# EAGLE board Lixieuhr_Master (EAGLE 7.7.0)

No outline drawn. Coordinates in mm, seen from the top.
Copper layers (1*16): Top 0.035mm / dielectric 1.5mm / Bottom 0.035mm
Design rules "default": minimum track width 10mil, minimum drill 24mil, track to track 8mil, track to pad 8mil, pad to pad 8mil, via to via 8mil, smd to smd 8mil, copper to edge 40mil, drill to drill 8mil, minimum pad ring 10mil, minimum via ring 8mil, stop-mask expansion 4mil, vias tented up to drill 0mil, thermal gap 10mil

## Footprints (pad centres in the part's own frame; a part is rotated, then mirrored left to right if it is on the bottom)
C0805 = smd 1.3 x 1.5: 1 -0.85,0; 2 0.85,0
E5-8,5 = drill 1 pad 2.54: + -2.54,0 | drill 1 pad 2.54 octagon: - 2.54,0
65100516121 = smd 0.5 x 2.5: 1 -1.6,3.875; 2 -0.8,3.875; 3 0,3.875; 4 0.8,3.875; 5 1.6,3.875 | smd 2 x 2.5: S1 -4.4,3.875; S2 4.4,3.875; S3 4.4,-1.625; S4 -4.4,-1.625 | hole 0.9: -2.2,1.275; 2.2,1.275
SON160P500X500X140-6N = smd 1.41 x 1.03: 1 -2.15,1.6; 2 -2.15,0; 3 -2.15,-1.6; 4 2.15,-1.6; 5 2.15,0; 6 2.15,1.6
QFN40P300X300X90-21N = smd 0.81 x 0.22: 1 -1.45,0.8; 2 -1.45,0.4; 3 -1.45,0; 4 -1.45,-0.4; 5 -1.45,-0.8; 11 1.45,-0.8; 12 1.45,-0.4; 13 1.45,0; 14 1.45,0.4; 15 1.45,0.8 | smd 0.22 x 0.81: 6 -0.8,-1.45; 7 -0.4,-1.45; 8 0,-1.45; 9 0.4,-1.45; 10 0.8,-1.45; 16 0.8,1.45; 17 0.4,1.45; 18 0,1.45; 19 -0.4,1.45; 20 -0.8,1.45 | smd 1.7 x 1.7: 21 0,0

## Placement (x,y rotation side)
C1  100nF  [C0805]  46.99,52.07 270 bottom
C2  100nF  [C0805]  41.91,52.07 270 bottom
C3  100nF  [C0805]  36.83,52.07 270 bottom
C4  100nF  [C0805]  31.75,52.07 270 bottom
C5  100nF  [C0805]  73.66,68.58 0 bottom
C6  100nF  [C0805]  58.42,68.58 0 bottom
C7  100nF  [C0805]  57.15,58.42 0 bottom
C8  100nF  [C0805]  49.53,58.42 0 bottom
C9  100nF  [C0805]  41.91,58.42 0 bottom
C10  100nF  [C0805]  34.29,58.42 0 bottom
C11  100nF  [C0805]  26.67,58.42 0 bottom
C12  100nF  [C0805]  72.39,64.77 0 bottom
C13  100nF  [C0805]  64.77,64.77 0 bottom
C14  100nF  [C0805]  57.15,64.77 0 bottom
C15  100nF  [C0805]  49.53,64.77 0 bottom
C16  100nF  [C0805]  41.91,64.77 0 bottom
C17  100nF  [C0805]  34.29,64.77 0 bottom
C18  100nF  [C0805]  26.67,64.77 0 bottom
C19  100nF  [C0805]  71.12,71.12 0 bottom
C20  100nF  [C0805]  64.77,71.12 0 bottom
C21  1mF  [E5-8,5]  82.55,66.04 0 top
J1  65100516121  [65100516121]  69.85,15.24 0 top
U1  APA102C  [SON160P500X500X140-6N]  48.26,5.08 0 top
U2  APA102C  [SON160P500X500X140-6N]  41.91,7.62 0 top
U3  APA102C  [SON160P500X500X140-6N]  35.56,11.43 0 top
U4  APA102C  [SON160P500X500X140-6N]  29.21,16.51 0 top
U5  APA102C  [SON160P500X500X140-6N]  30.48,5.08 0 top
U6  APA102C  [SON160P500X500X140-6N]  24.13,8.89 0 top
U7  APA102C  [SON160P500X500X140-6N]  17.78,12.7 0 top
U8  APA102C  [SON160P500X500X140-6N]  11.43,16.51 0 top
U9  APA102C  [SON160P500X500X140-6N]  35.56,20.32 0 top
U10  APA102C  [SON160P500X500X140-6N]  41.91,24.13 0 top
U11  APA102C  [SON160P500X500X140-6N]  17.78,20.32 0 top
U12  APA102C  [SON160P500X500X140-6N]  24.13,24.13 0 top
U13  APA102C  [SON160P500X500X140-6N]  30.48,27.94 0 top
U14  APA102C  [SON160P500X500X140-6N]  48.26,27.94 0 top
U15  APA102C  [SON160P500X500X140-6N]  24.13,31.75 0 top
U16  APA102C  [SON160P500X500X140-6N]  41.91,31.75 0 top
U17  APA102C  [SON160P500X500X140-6N]  35.56,35.56 0 top
U18  APA102C  [SON160P500X500X140-6N]  29.21,39.37 0 top
U19  APA102C  [SON160P500X500X140-6N]  17.78,35.56 0 top
U20  APA102C  [SON160P500X500X140-6N]  11.43,39.37 0 top
U21  ATTINY406-MFR  [QFN40P300X300X90-21N]  55.88,24.13 180 top

## Library data of the parts
C1-C21 = 0_HTL_MegaCard_V3
J1 = 65100516121; AVAILABILITY: In Stock; DESCRIPTION: USB - mini B USB 2.0 Receptacle Connector 5 Position Surface Mount, Right Angle; MF: Würth Elektronik; MP: 65100516121; PACKAGE: None; PRICE: None; PURCHASE-URL: https://pricing.snapeda.com/search/part/65100516121/?ref=eda
U1-U20 = APA102C; AVAILABILITY: Not in stock; DESCRIPTION: Addressable Lighting - 1 LED Discrete Serial Red, Green, Blue (RGB) 5.00mm L x 5.00mm W; MF: Shiji Lighting; MP: APA102C; PACKAGE: SMD-6 Shiji Lightning; PRICE: None
U21 = ATTINY406-MFR; AVAILABILITY: In Stock; DESCRIPTION: AVR AVR® ATtiny, Functional Safety (FuSa) Microcontroller IC 8-Bit 20MHz 4KB (4K x 8) FLASH 20-VQFN (3x3); MF: Microchip; MP: ATTINY406-MFR; PACKAGE: VQFN-20 Microchip; PRICE: None; PURCHASE-URL: https://pricing.snapeda.com/search/part/ATTINY406-MFR/?ref=eda

## Nets
EXP: U21.21
GND: C1.2 C2.2 C3.2 C4.2 C5.2 C6.2 C7.2 C8.2 C9.2 C10.2 C11.2 C12.2 C13.2 C14.2 C15.2 C16.2 C17.2 C18.2 C19.2 C20.2 C21.- J1.S1 J1.S2 J1.S3 J1.S4 U1.3 U2.3 U3.3 U4.3 U5.3 U6.3 U7.3 U8.3 U9.3 U10.3 U11.3 U12.3 U13.3 U14.3 U15.3 U16.3 U17.3 U18.3 U19.3 U20.3 U21.3
N$1: U6.5 U7.2
N$2: U7.5 U8.2
N$3: U8.5 U9.2
N$4: U9.5 U10.2
N$5: U11.5 U12.2
N$6: U12.5 U13.2
N$7: U13.5 U14.2
N$8: U14.5 U15.2
N$9: U16.5 U17.2
N$10: U17.5 U18.2
N$11: U18.5 U19.2
N$12: U19.5 U20.2
N$13: U16.6 U17.1
N$14: U17.6 U18.1
N$15: U18.6 U19.1
N$16: U19.6 U20.1
N$17: U14.6 U15.1
N$18: U13.6 U14.1
N$19: U12.6 U13.1
N$20: U11.6 U12.1
N$21: U6.6 U7.1
N$22: U7.6 U8.1
N$23: U8.6 U9.1
N$24: U9.6 U10.1
N$25: U1.5 U2.2
N$26: U1.6 U2.1
N$27: U2.5 U3.2
N$28: U2.6 U3.1
N$29: U3.5 U4.2
N$30: U3.6 U4.1
N$31: U4.5 U5.2
N$32: U4.6 U5.1
N$33: U15.6 U16.1
N$34: U1.2 U21.2
N$35: U1.1 U21.20
N$36: U5.5 U6.2
N$37: U5.6 U6.1
N$38: U10.5 U11.2
N$39: U10.6 U11.1
N$40: U15.5 U16.2
V+: C1.1 C2.1 C3.1 C4.1 C5.1 C6.1 C7.1 C8.1 C9.1 C10.1 C11.1 C12.1 C13.1 C14.1 C15.1 C16.1 C17.1 C18.1 C19.1 C20.1 C21.+ J1.1 U1.4 U2.4 U3.4 U4.4 U5.4 U6.4 U7.4 U8.4 U9.4 U10.4 U11.4 U12.4 U13.4 U14.4 U15.4 U16.4 U17.4 U18.4 U19.4 U20.4 U21.4

## Tracks (layer width: path | path; a pad name or v marks a point on that pad's centre or on a via)
GND  (45 unrouted)
N$1  (1 unrouted)
N$2  (1 unrouted)
N$3  (1 unrouted)
N$4  (1 unrouted)
N$5  (1 unrouted)
N$6  (1 unrouted)
N$7  (1 unrouted)
N$8  (1 unrouted)
N$9  (1 unrouted)
N$10  (1 unrouted)
N$11  (1 unrouted)
N$12  (1 unrouted)
N$13  (1 unrouted)
N$14  (1 unrouted)
N$15  (1 unrouted)
N$16  (1 unrouted)
N$17  (1 unrouted)
N$18  (1 unrouted)
N$19  (1 unrouted)
N$20  (1 unrouted)
N$21  (1 unrouted)
N$22  (1 unrouted)
N$23  (1 unrouted)
N$24  (1 unrouted)
N$25  (1 unrouted)
N$26  (1 unrouted)
N$27  (1 unrouted)
N$28  (1 unrouted)
N$29  (1 unrouted)
N$30  (1 unrouted)
N$31  (1 unrouted)
N$32  (1 unrouted)
N$33  (1 unrouted)
N$34  (1 unrouted)
N$35  (1 unrouted)
N$36  (1 unrouted)
N$37  (1 unrouted)
N$38  (1 unrouted)
N$39  (1 unrouted)
N$40  (1 unrouted)
V+  (42 unrouted)